# Altium PCB Carrier.PcbDoc (part 2 of 2)
Units mm, origin at the board's own origin, x right, y up, seen from the top; angles counter-clockwise.
Board outline 203.08 x 138.21 mm, 2 copper layers (Top Layer, Bottom Layer), stack 1.58 mm thick; 120 components, 113 nets, 492 pads, 85 vias.
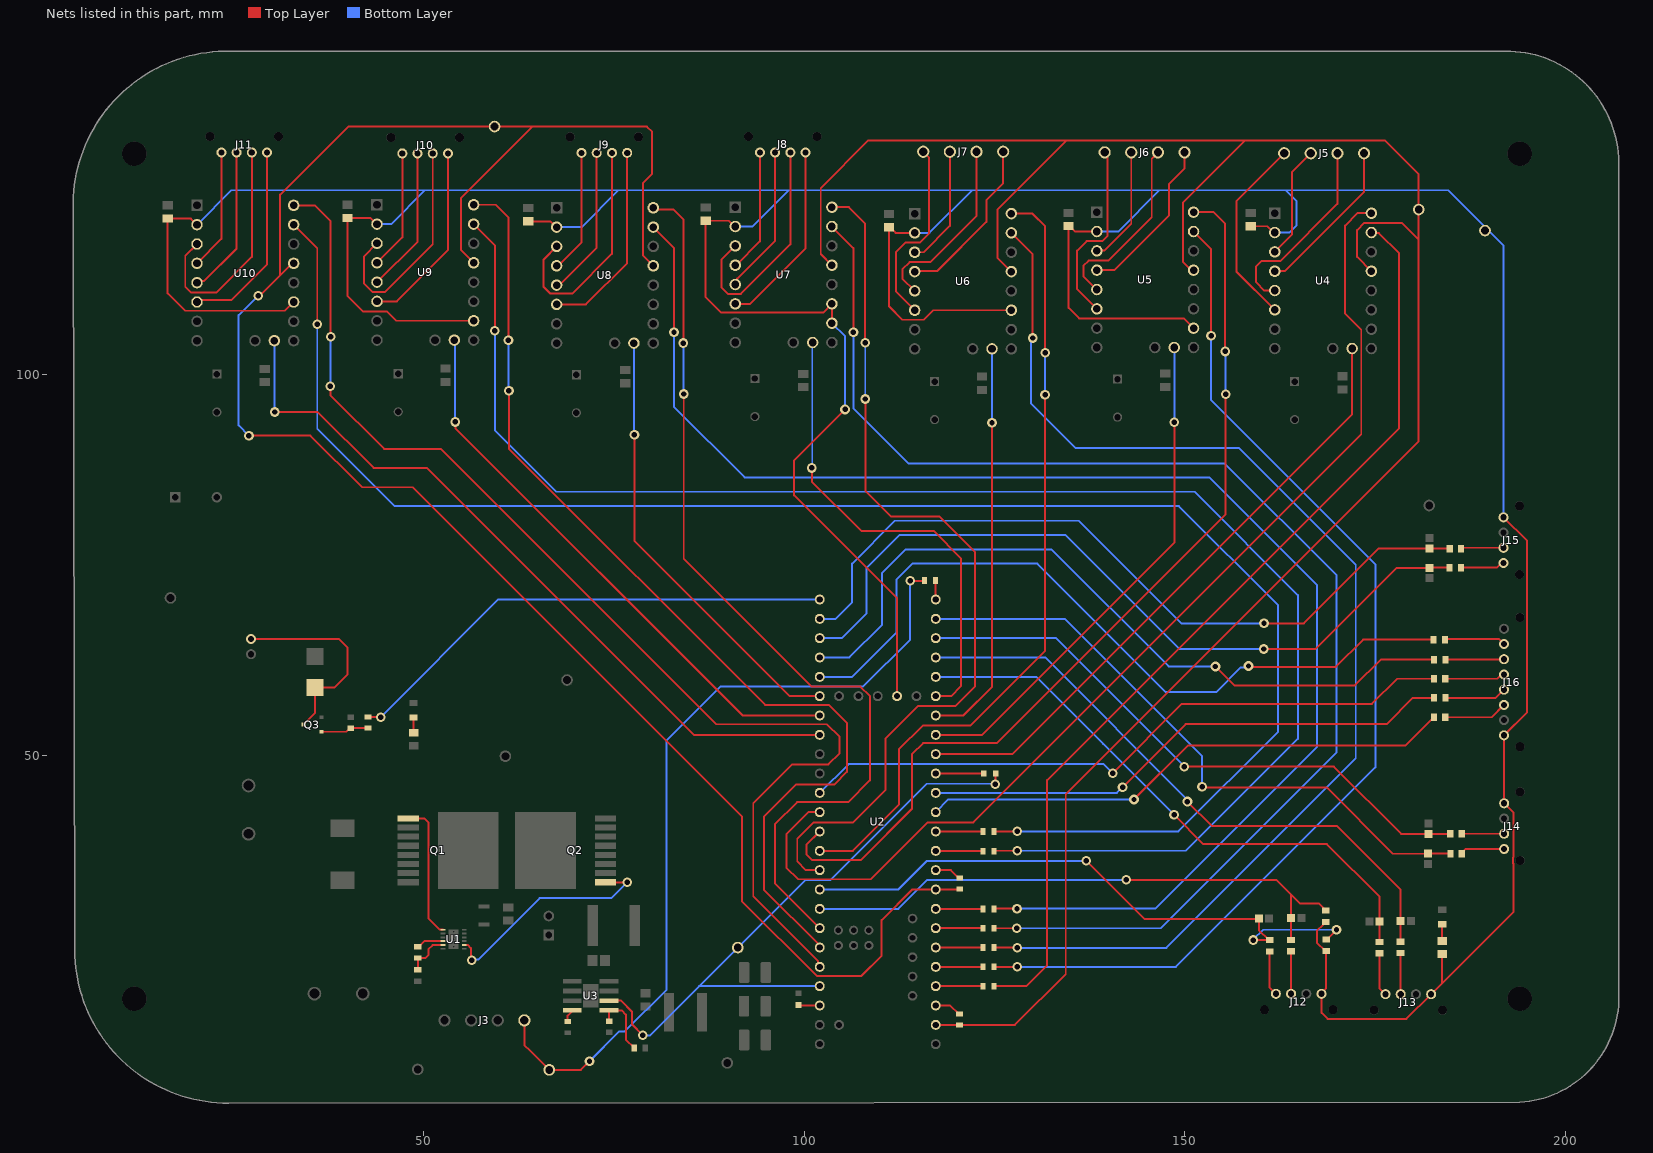
[diagram p2: the nets of this part, all layers, seen from the top]

## Via types
v1: diameter 1.27, hole 0.711, Top Layer to Bottom Layer, 65 vias
v2: diameter 0.6, hole 0.3, Top Layer to Bottom Layer, 20 vias

## Nets (pads, with @x,y where several pads share a name; then routed paths per layer and width w, separated by ;. In a path a pad name is that pad's centre, name@x,y a point inside that pad or via, vN(x,y) a via of type N, cw(c..) or ccw(c..) an arc to the next point about the centre after c; other vN are vias at no path point) (continued)
NetC31_1: C31.1 R20.1 R22.1 U2.19 | length 75.7
  Top Layer w0.254: v1(142.308,33.603) 162.023,33.603 163.967,31.659 ; R22.1@163.937,25.721 163.967,25.751 C31.1@163.967,28.588 163.967,31.659 ; R20.1@168.522,29.583 167.601,30.504 165.122,30.504 163.967,31.659
  Bottom Layer w0.254: U2.19@102.034,29.792 112.362,29.792 116.169,33.6 142.304,33.6 v1(142.308,33.603)
NetC32_1: C32.1 R21.1 R23.1 U2.18 | length 81.2
  Top Layer w0.254: v1(137.055,36.093) 144.664,28.484 159.676,28.484 C32.1@159.735,28.544 ; v1(159.003,25.69) 161.025,25.69 161.038,25.704 159.735,27.007 C32.1@159.735,28.484 ; R21.1@168.558,25.759 168.658,25.759 169.925,27.026 v1(169.925,27.043)
  Bottom Layer w0.254: U2.18@102.034,32.332 112.363,32.332 116.125,36.093 v1(137.055,36.093) ; v1(159.003,25.69) 159.003,25.778 160.267,27.043 v1(169.925,27.043)
NetC33_1: C33.1 R24.1 U2.29 | length 80.7
  Top Layer w0.254: v1(150.338,43.886) 153.575,40.649 170.004,40.649 178.338,32.315 C33.1@178.338,28.188 R24.1@178.338,25.471
  Bottom Layer w0.254: U2.29@117.274,62.812 131.641,62.812 150.338,44.116 v1(150.338,43.886)
NetC34_1: C34.1 R25.1 U2.28 | length 76.2
  Top Layer w0.254: v1(148.584,42.147) 152.446,38.285 168.662,38.285 175.58,31.366 C34.1@175.58,28.161 ; R25.1@175.553,25.458 C34.1@175.553,28.161
  Bottom Layer w0.254: U2.28@117.274,60.272 130.485,60.272 139.268,51.488 139.268,51.463 v1(148.584,42.147)
NetC35_1: C35.1 R26.1 U2.30 | length 78.3
  Top Layer w0.254: v1(149.936,48.479) 169.573,48.479 178.421,39.631 C35.1@181.993,39.631 184.833,39.631 R26.1@184.87,39.669
  Bottom Layer w0.254: U2.30@117.274,65.352 133.093,65.352 149.936,48.509 v1(149.936,48.479)
NetC36_1: C36.1 R27.1 U2.31 | length 82.8
  Top Layer w0.254: v1(152.263,45.842) 152.371,45.734 168.611,45.734 177.314,37.03 C36.1@181.973,37.03 181.997,37.054 R27.1@184.876,37.054
  Bottom Layer w0.254: U2.31@117.274,67.892 134.239,67.892 152.263,49.869 v1(152.263,45.842)
NetC37_1: C37.1 R28.1 U2.34 | length 100.8
  Top Layer w0.254: v1(160.391,67.293) 165.648,67.293 175.489,77.134 C37.1@182.131,77.134 184.781,77.134 R28.1@184.797,77.119
  Bottom Layer w0.254: U2.34@102.034,67.892 104.128,67.892 106.277,70.041 106.277,75.136 111.917,80.776 136.057,80.776 149.54,67.293 v1(160.391,67.293)
NetC38_1: C38.1 R29.1 U2.35 | length 102.5
  Top Layer w0.254: v1(160.352,63.932) 167.184,63.932 177.835,74.583 C38.1@182.122,74.583 182.148,74.609 R29.1@184.783,74.609
  Bottom Layer w0.254: U2.35@102.034,65.352 104.931,65.352 108.161,68.583 108.161,74.527 112.564,78.93 134.279,78.93 149.259,63.95 160.334,63.95 v1(160.352,63.932)
NetD2_1: D2.1 J4.2 Q3.3 | length 27.1
  Top Layer w0.254: J4.2@27.316,65.243 38.844,65.243 40.007,64.08 40.007,60.589 38.279,58.86 D2.1@35.73,58.86 35.73,55.544 Q3.3@34.192,54.007
NetD3_2: D3.2 R35.2 | length 2.2
  Top Layer w0.254: D3.2@183.802,27.77 183.802,25.569 R35.2@183.806,25.565
NetD4_2: D4.2 R36.1 | length 2
  Top Layer w0.254: D4.2@48.668,54.921 48.668,52.942 R36.1@48.69,52.921
NetJ3_4: J3.4 R9.1 TPE-STOP.1 | length 107.5
  Top Layer w0.254: J3.4@63.235,15.136 63.235,11.9 63.976,11.158 TPE-STOP.1@66.497,8.637 70.649,8.637 v1(71.786,9.774) ; v1(113.905,72.873) 115.77,72.873 R9.1@115.805,72.908
  Bottom Layer w0.254: v1(71.786,9.774) 75.694,13.682 76.419,13.682 81.926,19.189 81.926,51.924 89.004,59.002 107.743,59.002 113.905,65.164 v1(113.905,72.873)
NetJ5_1: J5.1 U4.4 | length 21.1
  Top Layer w0.254: U4.4@161.81,113.558 163.099,113.558 173.542,124.001 J5.1@173.542,129.055
NetJ5_2: J5.2 U4.5 | length 25.8
  Top Layer w0.254: U4.5@161.81,111.018 160.458,111.018 159.35,112.126 159.35,114.195 160.043,114.888 162.524,114.888 170.042,122.406 170.042,128.961 169.999,129.003 170.042,129.046 J5.2@170.042,129.055
NetJ5_3: J5.3 U4.3 | length 14.9
  Top Layer w0.254: U4.3@161.81,116.098 164.065,118.354 164.065,126.579 J5.3@166.542,129.055
NetJ5_4: J5.4 U4.6 | length 25.3
  Top Layer w0.254: U4.6@161.81,108.478 156.767,113.521 156.767,122.781 J5.4@163.042,129.055
NetJ6_1: J6.1 U5.4 | length 21.6
  Top Layer w0.254: U5.4@138.443,113.693 140.696,113.693 147.921,120.917 147.921,125.026 149.961,127.066 J6.1@149.961,129.171
NetJ6_2: J6.2 U5.5 | length 24.3
  Top Layer w0.254: U5.5@138.443,111.153 136.672,112.924 136.672,114.253 137.364,114.945 139.955,114.945 145.648,120.638 145.648,128.313 146.461,129.126 J6.2@146.461,129.171
NetJ6_3: J6.3 U5.3 | length 15.4
  Top Layer w0.254: U5.3@138.443,116.233 138.465,116.256 139.429,116.256 142.961,119.788 J6.3@142.961,129.171
NetJ6_4: J6.4 U5.6 | length 24.6
  Top Layer w0.254: U5.6@138.443,108.613 135.852,111.204 135.852,116.253 137.102,117.503 139.126,117.503 139.85,118.228 139.85,128.417 139.461,128.807 J6.4@139.461,129.171
NetJ7_1: J7.1 U6.4 | length 22.3
  Top Layer w0.254: U6.4@114.507,113.513 114.58,113.585 117.482,113.585 123.931,120.034 123.931,122.904 126.13,125.104 J7.1@126.13,129.255
NetJ7_2: J7.2 U6.5 | length 24.5
  Top Layer w0.254: U6.5@114.507,110.973 112.901,112.579 112.901,113.803 113.851,114.754 116.522,114.754 122.63,120.863 J7.2@122.63,129.255
NetJ7_3: J7.3 U6.3 | length 15.8
  Top Layer w0.254: U6.3@114.507,116.053 115.67,116.053 119.13,119.513 J7.3@119.13,129.255
NetJ7_4: J7.4 U6.6 | length 25.1
  Top Layer w0.254: U6.6@114.507,108.433 112.024,110.915 112.024,116.076 113.271,117.323 115.171,117.323 116.394,118.546 116.394,128.491 J7.4@115.63,129.255
NetJ8_1: J8.1 U7.4 | length 16.2
  Top Layer w0.254: U7.4@90.936,114.348 91.039,114.348 94.173,117.481 J8.1@94.173,129.161
NetJ8_2: J8.2 U7.5 | length 19.5
  Top Layer w0.254: U7.5@90.936,111.808 91.176,112.047 91.176,112.595 96.173,117.592 J8.2@96.173,129.161
NetJ8_3: J8.3 U7.3 | length 30.4
  Top Layer w0.254: U7.3@90.936,116.888 89.1,115.051 89.1,111.434 89.95,110.584 91.679,110.584 98.173,117.078 J8.3@98.173,129.161
NetJ8_4: J8.4 U7.6 | length 24.9
  Top Layer w0.254: U7.6@90.936,109.268 92.873,109.268 100.173,116.568 J8.4@100.173,129.161
NetJ9_1: J9.1 U8.4 | length 16.3
  Top Layer w0.254: U8.4@67.465,114.274 67.712,114.274 70.734,117.296 J9.1@70.734,129.107
NetJ9_2: J9.2 U8.5 | length 19.8
  Top Layer w0.254: U8.5@67.465,111.734 67.804,111.734 68.179,112.108 68.187,112.108 72.734,116.656 J9.2@72.734,129.107
NetJ9_3: J9.3 U8.3 | length 30.8
  Top Layer w0.254: U8.3@67.465,116.814 65.744,115.093 65.744,111.54 66.662,110.621 69.531,110.621 74.734,115.825 J9.3@74.734,129.107
NetJ9_4: J9.4 U8.6 | length 26
  Top Layer w0.254: U8.6@67.465,109.194 71.323,109.194 76.734,114.605 J9.4@76.734,129.107
NetJ10_1: J10.1 U9.4 | length 15.7
  Top Layer w0.254: U9.4@43.867,114.669 47.196,117.998 J10.1@47.196,129.035
NetJ10_2: J10.2 U9.5 | length 19.1
  Top Layer w0.254: U9.5@43.867,112.129 49.196,117.458 J10.2@49.196,129.035
NetJ10_3: J10.3 U9.3 | length 30
  Top Layer w0.254: U9.3@43.867,117.209 42.166,115.508 42.166,111.926 43.262,110.829 44.953,110.829 51.196,117.072 J10.3@51.196,129.035
NetJ10_4: J10.4 U9.6 | length 24.8
  Top Layer w0.254: U9.6@43.867,109.589 46.476,109.589 53.196,116.309 J10.4@53.196,129.035
NetJ11_1: J11.1 U10.4 | length 15.9
  Top Layer w0.254: U10.4@20.224,114.593 23.428,117.797 J11.1@23.428,129.146
NetJ11_2: J11.2 U10.5 | length 19.7
  Top Layer w0.254: U10.5@20.224,112.053 20.416,112.245 21.13,112.245 25.428,116.543 J11.2@25.428,129.146
NetJ11_3: J11.3 U10.3 | length 31
  Top Layer w0.254: U10.3@20.224,117.133 18.677,115.586 18.677,111.546 19.473,110.75 22.738,110.75 27.428,115.44 J11.3@27.428,129.146
NetJ11_4: J11.4 U10.6 | length 25.9
  Top Layer w0.254: U10.6@20.224,109.513 20.464,109.753 24.709,109.753 29.428,114.472 J11.4@29.428,129.146
NetJ12_3: J12.3 R22.2 | length 5.6
  Top Layer w0.254: R22.2@163.937,24.221 163.937,18.652 J12.3@163.958,18.631
NetJ12_4: J12.4 R23.2 | length 5.9
  Top Layer w0.254: R23.2@161.138,24.204 161.138,19.451 J12.4@161.958,18.631
NetJ13_3: J13.3 R24.2 | length 5.4
  Top Layer w0.254: J13.3@178.352,18.581 R24.2@178.352,23.971
NetJ13_4: J13.4 R25.2 | length 5.7
  Top Layer w0.254: R25.2@175.553,23.958 175.553,19.38 J13.4@176.352,18.581
NetJ14_3: J14.3 R26.2 | length 5.6
  Top Layer w0.254: R26.2@186.37,39.669 186.383,39.656 J14.3@191.944,39.656
NetJ14_4: J14.4 R27.2 | length 5.9
  Top Layer w0.254: R27.2@186.376,37.054 186.376,37.154 186.878,37.656 J14.4@191.944,37.656
NetJ15_3: J15.3 R28.2 | length 5.6
  Top Layer w0.254: R28.2@186.297,77.119 186.404,77.226 J15.3@191.852,77.226
NetJ15_4: J15.4 R29.2 | length 5.8
  Top Layer w0.254: R29.2@186.283,74.609 190.996,74.609 191.613,75.226 J15.4@191.852,75.226
NetJ16_3: J16.3 R30.2 | length 8.4
  Top Layer w0.254: R30.2@184.206,54.963 190.303,54.963 J16.3@191.926,56.586
NetJ16_4: J16.4 R31.2 | length 8.1
  Top Layer w0.254: R31.2@184.239,57.501 190.841,57.501 J16.4@191.926,58.586
NetJ16_5: J16.5 R32.2 | length 8
  Top Layer w0.254: R32.2@184.206,60.019 191.07,60.019 191.637,60.586 J16.5@191.926,60.586
NetJ16_6: J16.6 R33.2 | length 7.7
  Top Layer w0.254: R33.2@184.247,62.526 191.866,62.526 J16.6@191.926,62.586
NetJ16_7: J16.7 R34.2 | length 8
  Top Layer w0.254: R34.2@184.165,65.157 184.227,65.218 191.293,65.218 J16.7@191.926,64.586
NetQ1_1: Q1.1 U1.1 | length 18
  Top Layer w0.254: Q1.1@47.961,41.68 50.097,41.68 50.618,41.159 50.618,28.533 52.084,27.066 U1.1@52.553,27.066
NetQ2_1: Q2.1 U1.8 | length 30.2
  Top Layer w0.254: U1.8@55.333,25.046 55.336,25.043 55.81,25.043 56.214,24.639 56.214,23.129 v1(56.311,23.032) ; Q2.1@73.895,33.28 73.897,33.278 v1(76.741,33.278)
  Bottom Layer w0.254: v1(56.311,23.032) 56.4,23.12 57.152,23.12 65.23,31.199 74.662,31.199 v1(76.741,33.278)
NetQ3_1: Q3.1 R3.2 R4.2 | length 6.4
  Top Layer w0.254: Q3.1@36.579,53.057 39.857,53.057 40.339,53.538 R3.2@40.428,53.538 R3.2@40.438,53.548 ; R3.2@40.383,53.532 R4.2@42.682,53.532
NetR1_1: R1.1 R2.1 U1.5 | length 6
  Top Layer w0.254: R1.1@49.249,21.779 49.249,23.307 R2.1@49.224,23.332 50.221,23.332 50.61,23.721 50.61,24.477 51.17,25.037 U1.5@52.553,25.037
NetR2_2: R2.2 U1.4 | length 3.6
  Top Layer w0.254: R2.2@49.224,24.831 49.364,24.831 50.079,25.546 U1.4@52.553,25.546
NetR4_1: R4.1 U2.33 | length 65.7
  Top Layer w0.254: R4.1@42.692,54.992 42.699,54.987 44.368,54.987 v1(44.373,54.981)
  Bottom Layer w0.254: v1(44.373,54.981) 59.824,70.432 U2.33@102.034,70.432
NetR5_1: R5.1 R11.2 U3.5 | length 8.7
  Top Layer w0.254: R11.2@74.362,14.999 U3.5@74.362,16.454 76.015,16.454 76.579,15.89 76.579,12.603 R5.1@77.658,11.524
NetR6_1: R6.1 U10.10 | length 223.3
  Top Layer w0.254: U10.10@32.924,119.673 36.02,116.578 v1(36.02,106.6) ; R6.1@124.94,39.936 124.976,39.971 v1(127.972,39.971)
  Bottom Layer w0.254: v1(36.02,106.6) 36.02,92.876 46.197,82.699 149.214,82.699 162.24,69.672 162.24,53.055 149.156,39.971 v1(127.972,39.971)
NetR6_2: R6.2 U2.10 | length 6.2
  Top Layer w0.254: U2.10@117.274,39.952 123.474,39.952 R6.2@123.49,39.936
NetR7_1: R7.1 U2.4 | length 6.2
  Top Layer w0.254: U2.4@117.274,24.712 123.462,24.712 R7.1@123.478,24.697
NetR7_2: R7.2 U6.10 | length 158.4
  Top Layer w0.254: R7.2@124.928,24.697 127.939,24.697 v1(127.963,24.673) ; U6.10@127.207,118.593 130.008,115.791 130.008,104.794 v1(130,104.786)
  Bottom Layer w0.254: v1(127.963,24.673) 147.569,24.673 172.453,49.558 172.453,75.003 157.134,90.321 135.659,90.321 129.77,96.21 129.77,104.129 129.806,104.165 129.806,104.592 v1(130,104.786)
NetR8_1: R8.1 U2.3 | length 6.2
  Top Layer w0.254: U2.3@117.274,22.172 123.452,22.172 R8.1@123.454,22.175
NetR8_2: R8.2 U5.10 | length 141.3
  Top Layer w0.254: R8.2@124.904,22.175 v1(127.963,22.175) ; U5.10@151.143,118.773 151.143,118.732 153.45,116.425 153.45,105.093 v1(153.44,105.084)
  Bottom Layer w0.254: v1(127.963,22.175) 148.829,22.175 175.03,48.375 175.03,75.04 153.44,96.63 v1(153.44,105.084)
NetR9_2: R9.2 U2.32 | length 2.5
  Top Layer w0.254: R9.2@117.264,72.899 117.264,70.442 U2.32@117.274,70.432
NetR10_2: R10.2 U3.4 | length 1.7
  Top Layer w0.254: R10.2@68.922,14.971 68.922,15.759 U3.4@69.574,16.411
NetR12_1: R12.1 U9.10 | length 207.6
  Top Layer w0.254: U9.10@56.567,119.749 59.352,116.964 v1(59.352,105.73) ; R12.1@124.949,37.351 125.017,37.419 v1(127.988,37.419)
  Bottom Layer w0.254: v1(59.352,105.73) 59.352,92.671 67.437,84.586 151.29,84.586 164.857,71.019 164.857,52.132 150.145,37.419 v1(127.988,37.419)
NetR12_2: R12.2 U2.9 | length 6.3
  Top Layer w0.254: U2.9@117.274,37.412 123.438,37.412 R12.2@123.499,37.351
NetR13_1: R13.1 U8.10 | length 191.4
  Top Layer w0.254: U8.10@80.165,119.354 82.886,116.633 v1(82.886,105.543) ; R13.1@124.939,29.783 124.969,29.813 v1(127.953,29.813)
  Bottom Layer w0.254: v1(82.886,105.543) 82.879,105.536 82.879,95.773 92.171,86.48 153.235,86.48 167.347,72.369 167.347,51.043 146.117,29.813 v1(127.953,29.813)
NetR13_2: R13.2 U2.6 | length 6.2
  Top Layer w0.254: U2.6@117.274,29.792 123.48,29.792 R13.2@123.489,29.783
NetR14_1: R14.1 U2.8 | length 3.6
  Top Layer w0.254: U2.8@117.274,34.872 119.259,34.872 120.302,33.83 R14.1@120.427,33.83
NetR14_2: R14.2 TPUART_J5CLAW.1 U2.7 U8.12 U9.12 U10.12 | length 267.7
  Top Layer w0.254: v1(27.045,91.959) 35.119,91.959 41.904,85.173 48.558,85.173 91.803,41.929 91.803,30.819 101.675,20.947 107.454,20.947 110.153,23.646 110.153,28.306 114.18,32.332 U2.7@117.274,32.332 cw(c117.331,32.275) 117.331,32.356 120.104,32.356 R14.2@120.427,32.38 ; v1(28.25,110.334) 28.458,110.334 31.153,113.029 ; U10.12@32.924,114.593 32.717,114.593 31.153,113.029 ; U9.12@56.567,114.669 54.886,116.35 54.886,123.163 64.285,132.561 ; U8.12@80.165,114.274 78.839,115.599 78.839,125.176 80.021,126.358 80.021,131.856 79.316,132.561 64.285,132.561 ; 31.153,113.029 31.153,123.615 40.099,132.561 TPUART_J5CLAW.1@59.319,132.561 64.285,132.561
  Bottom Layer w0.254: v1(27.045,91.959) 25.696,93.308 25.696,107.779 v1(28.25,110.334)
NetR15_1: R15.1 U4.10 | length 125.6
  Top Layer w0.254: R15.1@124.928,19.629 129.168,19.629 131.912,22.374 131.912,46.716 178.153,92.956 178.153,115.896 175.496,118.553 174.595,118.553 U4.10@174.51,118.638
NetR15_2: R15.2 U2.2 | length 6.2
  Top Layer w0.254: U2.2@117.274,19.632 R15.2@123.478,19.632
NetR16_1: R16.1 U2.1 | length 3.6
  Top Layer w0.254: U2.1@117.274,17.092 119.183,17.092 120.279,15.996 R16.1@120.404,15.996
NetR16_2: R16.2 TPUART_J1J4.1 U2.0 U4.12 U5.12 U6.12 U7.12 | length 296.4
  Top Layer w0.254: U7.12@103.636,114.348 102.163,115.82 102.163,124.487 108.428,130.753 134.515,130.753 ; U2.0@117.274,14.552 117.277,14.549 120.401,14.549 R16.2@120.404,14.546 127.68,14.546 134.355,21.221 134.355,44.839 180.717,91.201 180.717,117.694 ; U6.12@127.207,113.513 125.38,115.34 125.38,121.618 134.515,130.753 ; U5.12@151.143,113.693 150.864,113.693 149.753,114.804 149.753,122.584 157.921,130.753 ; U4.12@174.51,113.558 172.627,115.441 172.627,118.947 173.594,119.913 178.498,119.913 180.717,117.694 ; 134.515,130.753 157.921,130.753 ; 157.921,130.753 176.272,130.753 180.717,126.308 TPUART_J1J4.1@180.717,121.659 180.717,117.694
NetR17_1: R17.1 U2.3.3V_1 | length 6.3
  Top Layer w0.254: U2.3.3V_1@117.274,47.572 R17.1@123.594,47.572
NetR17_2: R17.2 TPPG.1 U2.23 U3.6 | length 84.6
  Top Layer w0.254: U3.6@74.362,17.724 75.934,17.724 77.369,16.289 77.369,14.609 v1(78.803,13.175) ; v1(125.084,46.146) 125.114,46.177 125.114,47.554 R17.2@125.144,47.584
  Bottom Layer w0.254: v1(78.803,13.175) 79.742,13.175 86.199,19.632 ; U2.23@102.034,19.632 86.199,19.632 ; v1(125.084,46.146) 125.009,46.221 116.091,46.221 103.438,33.568 100.135,33.568 91.803,25.237 86.199,19.632
NetR18_1: R18.1 U2.5 | length 6.2
  Top Layer w0.254: U2.5@117.274,27.252 123.475,27.252 R18.1@123.486,27.241
NetR18_2: R18.2 U7.10 | length 175.4
  Top Layer w0.254: U7.10@103.636,119.428 106.46,116.603 v1(106.46,105.554) ; R18.2@124.936,27.241 v1(127.933,27.241)
  Bottom Layer w0.254: v1(106.46,105.554) 106.46,95.529 113.699,88.29 155.264,88.29 169.9,73.654 169.9,50.319 146.822,27.241 v1(127.933,27.241)
NetR19_1: R19.1 U2.3.3V_2 | length 2.8
  Top Layer w0.254: R19.1@99.248,17.149 99.277,17.121 102.005,17.121 U2.3.3V_2@102.034,17.092
NetR30_1: R30.1 U2.11 | length 70.7
  Top Layer w0.254: v1(143.319,44.161) 150.395,51.237 178.98,51.237 182.333,54.59 182.433,54.59 182.706,54.863 R30.1@182.706,54.963
  Bottom Layer w0.254: U2.11@117.274,42.492 118.943,44.161 v1(143.319,44.161)
NetR31_1: R31.1 U2.12 | length 70.6
  Top Layer w0.254: v1(141.815,45.783) 150.094,54.061 176.511,54.061 179.95,57.501 R31.1@182.739,57.501
  Bottom Layer w0.254: U2.12@117.274,45.032 141.065,45.032 v1(141.815,45.783)
NetR32_1: R32.1 U2.13 | length 87.9
  Top Layer w0.254: v1(140.529,47.625) 149.614,56.71 174.568,56.71 177.876,60.019 R32.1@182.706,60.019
  Bottom Layer w0.254: U2.13@102.034,45.032 105.817,48.816 139.339,48.816 v1(140.529,47.625)
NetR33_1: R33.1 U2.36 | length 99.4
  Top Layer w0.254: v1(154.017,61.632) 156.507,59.141 172.349,59.141 175.734,62.526 R33.1@182.747,62.526
  Bottom Layer w0.254: U2.36@102.034,62.812 105.924,62.812 110.184,67.072 110.184,73.862 113.345,77.023 132.476,77.023 147.867,61.632 v1(154.017,61.632)
NetR34_1: R34.1 U2.37 | length 100.8
  Top Layer w0.254: v1(158.358,61.695) 158.484,61.569 169.83,61.569 173.418,65.157 R34.1@182.665,65.157
  Bottom Layer w0.254: U2.37@102.034,60.272 106.304,60.272 112.103,66.071 112.103,73.043 114.216,75.157 130.614,75.157 147.504,58.267 154.117,58.267 157.35,61.5 158.163,61.5 v1(158.358,61.695)
NetU2_14: U2.14 U4.9 | length 142.8
  Top Layer w0.254: U2.14@102.034,42.492 100.55,42.492 97.64,39.582 97.64,35.217 99.182,33.675 108.723,33.675 116.209,41.16 122.207,41.16 173.175,92.128 173.175,105.845 171.052,107.968 171.052,119.555 172.675,121.178 U4.9@174.51,121.178
NetU2_15: U2.15 U5.9 | length 125.1
  Top Layer w0.254: U2.15@102.034,39.952 100.287,38.205 100.287,36.952 101.044,36.195 107.403,36.195 114.182,42.975 114.182,50.141 115.601,51.56 125.309,51.56 155.352,81.604 v1(155.352,97.378) ; U5.9@151.143,121.313 153.797,121.313 155.286,119.824 v1(155.286,103.019)
  Bottom Layer w0.254: v1(155.286,103.019) 155.319,102.986 155.319,97.411 v1(155.352,97.378)
NetU2_16: U2.16 U6.9 | length 105.6
  Top Layer w0.254: U2.16@102.034,37.412 106.375,37.412 112.441,43.478 112.441,50.739 115.565,53.864 121.808,53.864 131.634,63.69 v1(131.634,97.307) ; U6.9@127.207,121.133 129.983,121.133 131.635,119.481 131.635,102.856 v1(131.64,102.851)
  Bottom Layer w0.254: v1(131.634,97.307) 131.637,97.31 131.637,102.848 v1(131.64,102.851)
NetU2_17: U2.17 U7.9 | length 117.8
  Top Layer w0.254: U2.17@102.034,34.872 100.225,34.872 99.08,36.017 99.08,39.011 101.194,41.125 106.397,41.125 110.701,45.429 110.701,52.202 114.963,56.464 119.871,56.464 122.452,59.045 122.452,76.656 117.778,81.329 111.421,81.329 108.027,84.724 108.027,96.765 v1(108.031,96.769) ; U7.9@103.636,121.968 105.856,121.968 108.001,119.822 v1(108.001,104.141)
  Bottom Layer w0.254: v1(108.001,104.141) 108.016,104.126 108.016,96.784 v1(108.031,96.769)
NetU2_20: U2.20 U8.9 | length 123.1
  Top Layer w0.254: U8.9@80.165,121.894 80.404,121.654 82.84,121.654 84.123,120.371 v1(84.123,104.121) ; v1(84.167,97.425) 84.167,75.814 100.982,58.998 107.377,58.998 108.608,57.767 108.608,46.662 105.767,43.82 99.068,43.82 96.139,40.891 96.139,33.147 U2.20@102.034,27.252
  Bottom Layer w0.254: v1(84.123,104.121) 84.145,104.1 84.145,97.447 v1(84.167,97.425)
NetU2_21: U2.21 U9.9 | length 135
  Top Layer w0.254: U9.9@56.567,122.289 59.46,122.289 61.165,120.584 61.165,104.507 v1(61.138,104.48) ; v1(61.204,97.844) 61.204,90.238 94.845,56.597 103.23,56.597 105.606,54.222 105.606,47.78 103.975,46.149 98.963,46.149 94.702,41.888 94.702,32.309 102.034,24.977 U2.21@102.034,24.712
  Bottom Layer w0.254: v1(61.138,104.48) 61.171,104.447 61.171,97.877 v1(61.204,97.844)
NetU2_22: U2.22 U10.9 | length 155.4
  Top Layer w0.254: U10.9@32.924,122.213 35.709,122.213 37.779,120.143 v1(37.779,104.967) ; v1(37.748,98.444) 37.745,98.442 37.745,97.27 44.808,90.207 52.245,90.207 88.411,54.041 102.975,54.041 104.632,52.385 104.632,50.238 103.163,48.77 98.403,48.77 93.298,43.664 93.298,31.458 101.832,22.924 101.832,22.374 U2.22@102.034,22.172
  Bottom Layer w0.254: v1(37.748,98.444) 37.763,98.46 37.763,104.951 v1(37.779,104.967)
NetU2_24: U2.24 U4.18 | length 81.8
  Top Layer w0.254: U2.24@117.274,50.112 127.346,50.112 171.97,94.736 U4.18@171.97,103.398
NetU2_25: U2.25 U5.18 | length 67.4
  Top Layer w0.254: U2.25@117.274,52.652 123.376,52.652 148.621,77.897 v1(148.621,93.703)
  Bottom Layer w0.254: U5.18@148.603,103.533 148.612,103.524 148.612,93.712 v1(148.621,93.703)
NetU2_26: U2.26 U6.18 | length 53.3
  Top Layer w0.254: U2.26@117.274,55.192 120.891,55.192 124.667,58.968 v1(124.667,93.629)
  Bottom Layer w0.254: v1(124.667,93.629) U6.18@124.667,103.353
NetU2_27: U2.27 U7.18 | length 62.7
  Top Layer w0.254: v1(100.999,87.715) 100.999,85.924 107.487,79.436 116.987,79.436 120.589,75.835 120.589,59.031 119.29,57.732 U2.27@117.274,57.732
  Bottom Layer w0.254: v1(100.999,87.715) 101.047,87.764 101.047,104.139 U7.18@101.096,104.188
NetU2_38: U2.38 U8.18 | length 58.9
  Top Layer w0.254: v1(77.689,92.074) 77.689,78.151 98.108,57.732 U2.38@102.034,57.732
  Bottom Layer w0.254: U8.18@77.625,104.114 77.632,104.106 77.632,91.95 v1@77.639,91.943
NetU2_39: U2.39 U9.18 | length 75.1
  Top Layer w0.254: v1(54.152,93.759) 54.198,93.713 54.198,92.892 91.897,55.192 U2.39@102.034,55.192
  Bottom Layer w0.254: U9.18@54.027,104.509 54.089,104.447 54.089,93.821 v1(54.152,93.759)
NetU2_40: U2.40 U10.18 | length 98.6
  Top Layer w0.254: v1(30.437,95.06) 36.089,95.06 43.422,87.727 50.408,87.727 85.483,52.652 U2.40@102.034,52.652
  Bottom Layer w0.254: U10.18@30.384,104.433 30.41,104.407 30.41,95.087 v1(30.437,95.06)
VIO_SHARED: C18.1 C19.1 C20.1 C21.1 C28.1 C29.1 C30.1 J12.1 J13.1 J14.1 J15.1 J16.1 R20.2 R21.2 R35.1 TPVIO_SHARED.1 U2.3.3V_3 U4.2 U5.2 U5.15 U6.2 U6.14 U7.2 U7.14 U7.15 U8.2 U9.2 U9.15 U10.2 U10.14 | length 599.8
  Top Layer w0.254: U10.2@20.224,119.673 20.209,119.673 19.414,120.468 C29.1@16.375,120.468 16.375,110.649 18.662,108.361 31.772,108.361 U10.14@32.924,109.513 ; U9.2@43.867,119.749 43.822,119.749 43.042,120.529 C19.1@40.002,120.529 40.002,110.286 41.997,108.29 45.131,108.29 46.372,107.049 U9.15@56.567,107.049 ; C28.1@63.756,120.116 66.622,120.116 67.385,119.354 U8.2@67.465,119.354 ; U7.2@90.936,119.428 90.847,119.428 90.089,120.186 C18.1@87.048,120.186 87.048,110.164 89.089,108.123 102.492,108.123 U7.14@103.636,109.268 U7.15@103.636,106.728 ; v1(105.36,95.398) 98.665,88.703 98.665,84.117 112.194,70.588 U2.3.3V_3@112.194,57.732 ; U6.2@114.507,118.593 112.012,118.593 111.272,119.332 C20.1@111.133,119.332 111.133,108.949 112.897,107.184 115.715,107.184 116.963,108.433 U6.14@127.207,108.433 ; U5.2@138.443,118.773 135.574,118.773 134.87,119.477 C21.1@134.73,119.477 134.73,108.74 136.097,107.372 149.843,107.372 U5.15@151.143,106.073 ; C30.1@158.657,119.465 160.846,119.465 161.673,118.638 U4.2@161.81,118.638 ; R21.2@168.497,24.298 168.418,24.298 167.355,25.361 167.355,26.916 168.149,27.71 168.149,27.81 168.422,28.083 R20.2@168.522,28.083 ; R21.2@168.558,24.259 168.558,19.374 167.958,18.775 J12.1@167.958,18.631 167.958,16.128 168.747,15.339 179.111,15.339 J13.1@182.352,18.581 183.806,20.034 ; R35.1@183.806,23.859 183.806,20.034 ; J15.1@191.852,81.226 194.95,78.128 194.95,55.61 J16.1@191.926,52.586 191.935,52.577 191.935,43.665 J14.1@191.944,43.656 193.195,42.405 193.195,36.613 193.12,36.539 193.12,35.773 193.195,35.698 193.195,29.423 183.806,20.034
  Bottom Layer w0.254: U10.2@20.224,119.673 24.743,124.192 50.167,124.192 ; U9.2@43.867,119.749 45.724,119.749 50.167,124.192 ; U8.2@67.465,119.354 70.753,119.354 75.591,124.192 ; U7.2@90.936,119.428 93.171,119.428 97.936,124.192 ; U7.15@103.636,106.728 105.36,105.003 v1(105.36,95.398) ; U6.2@114.507,118.593 116.448,118.593 122.047,124.192 ; U5.2@138.443,118.773 141.242,118.773 146.661,124.192 ; U4.2@161.81,118.638 163.688,118.638 164.669,119.62 164.669,122.761 163.238,124.192 ; J15.1@191.852,81.226 191.852,116.948 184.608,124.192 163.238,124.192 ; 50.167,124.192 75.591,124.192 ; 75.591,124.192 97.936,124.192 ; 97.936,124.192 122.047,124.192 ; 122.047,124.192 146.661,124.192 ; 146.661,124.192 163.238,124.192
pads on no net: J8.5 J8.6 J9.5 J9.6 J10.5 J10.6 J11.5 J11.6 J12.5 J12.6 J13.5 J13.6 J14.5 J14.6 J15.5 J15.6 J16.9 J16.10 U1.13 U1.14 U1.15 U1.16 U2.5V U2.D+ U2.D- U2.LED U2.ON/OFF U2.PROGRAM U2.R+ U2.R- U2.T+ U2.T- U2.VBAT U2.VUSB U4.11 U4.13 U4.17 U5.11 U5.13 U5.17 U6.11 U6.13 U6.17 U7.11 U7.13 U7.17 U8.11 U8.13 U8.17 U9.11 U9.13 U9.17 U10.11 U10.13 U10.17

## Polygon pours and split planes (outlines as drawn)
24V_Protected on Top Layer (solid, remove dead copper, pour order 61): 51.513,14.457 52.014,13.949 53.149,13.949 53.937,14.737 53.937,16.183 55.159,17.406 66.139,17.418 66.126,17.405 68.319,17.418 70.713,17.418 70.713,19.31 68.319,19.31 67.662,19.967 67.662,20.55 69.412,22.3 72.62,22.3 72.62,30.411 72.118,30.914 72.118,33.682 72.521,34.085 75.895,34.085 76.185,34.376 76.185,47.102 71.816,51.471 30.301,51.471 29.102,52.671 29.079,60.868 30.056,61.845 36.86,61.845 37.217,62.202 37.217,63.733 36.895,64.055 26.794,64.055 25.103,62.363 25.103,45.153 25.605,44.651 49.555,44.651 51.72,46.815 68.56,46.815 70.793,44.582 70.793,31.11 66.746,27.063 65.772,27.063 64.385,25.676 55.049,25.676 55.049,25.426 55.669,25.426 57.472,23.624 57.472,22.362 56.988,21.879 54.552,21.879 51.572,19.157
+24V on Top Layer (solid, pour order 59): 43.816,23.256 45.474,23.256 47.845,25.628 48.146,25.929 52.866,25.929 52.866,26.666 51.168,26.666 49.649,28.185 49.649,40.593 49.361,40.88 43.373,40.88 33.37,30.877 33.37,18.743 34.672,17.581 38.141,17.581
NetC1_1 on Top Layer "Top Layer-NetC1_1" (solid, pour order 22): 60.427,30.9 60.443,29.457 61.789,29.457 61.789,30.93 62.089,31.23 62.582,31.723 62.801,31.942 69.543,31.942 69.995,32.393 69.995,43.785 68.273,45.508 53.148,45.508 51.861,44.221 51.861,32.43 55.023,29.268 55.023,26.921 55.824,26.921 55.824,30.462 56.592,31.23 60.095,31.23
NetC7_2 on Top Layer "NETC7_2_L01_P033" (solid, remove dead copper, pour order 33): 73.125,20.575 73.125,19.953 76.672,19.953 78.51,18.115 79.943,18.115 81.3,16.758 81.3,13.987 81.585,13.703 82.88,13.703 83.18,14.003 83.18,18.407 82.354,19.233 79.805,19.233 78.463,20.575 75.599,20.575
24V_Motor on Top Layer "24V_MOTOR_L01_P045" (solid, pour order 45): 22.195,36.206 12.544,45.857 12.544,98.086 19.803,105.346 24.384,105.346 26.517,103.212 40.171,103.212 42.457,105.498 47.998,105.498 50.284,103.212 64.611,103.212 66.555,105.156 71.77,105.156 74.324,102.602 87.263,102.602 89.969,105.308 94.494,105.308 97.199,102.602 112.425,102.602 114.181,104.358 118.578,104.358 121.203,101.733 134.555,101.733 137.59,104.768 142.477,104.768 145.369,101.972 158.584,101.972 161.094,104.482 165.843,104.482 169.478,100.847 171.196,100.847 171.398,100.645 171.398,99.206 165.827,99.206 165.057,98.436 149.23,98.436 148.114,99.552 148.063,99.501 142.524,99.501 141.783,98.761 124.454,98.761 124.048,99.167 123.997,99.117 118.437,99.117 117.752,98.431 101.65,98.431 100.562,99.519 100.511,99.469 94.785,99.469 94.156,98.839 78.366,98.839 77.179,100.027 71.398,100.027 70.702,99.331 54.445,99.331 53.578,100.198 53.527,100.147 47.978,100.147 47.293,99.462 30.547,99.462 29.832,100.177 24.23,100.177 23.471,99.418 18.927,94.874 18.927,50.036 29,39.963 29,37 28.206,36.206
NetC4_1 on Top Layer (solid, remove dead copper, pour order 51): 85.329,9.89 87.349,7.87 100.506,7.87 103.19,10.555 103.19,12.473 102.568,13.096 101.033,13.096 98.304,10.367 94.229,10.367 93.075,11.522 93.075,22.589 92.624,23.039 90.261,23.039 85.329,18.108 85.329,13.462 84.115,12.248 79.027,12.248 78.697,11.918 78.697,11.13 79.938,9.89
no net on Top Layer "NONET_L01_P052" (solid, pour order 52): 25.103,45.153 25.608,44.648 44.642,44.648 44.645,44.651 25.605,44.651 25.103,45.153
GND on Bottom Layer "GND_L02_P062" (solid, pour order 62): 4.161,24.355 ccw(c24.314,24.417) 24.377,4.263 24.345,4.276 193.968,4.374 193.999,4.373 ccw(c193.194,18.174) 206.995,18.979 206.995,127.863 ccw(c192.256,127.728) 192.12,142.467 24.593,142.469 ccw(c24.222,122.187) 3.94,122.558

## Keep-outs
Top Layer:
  region: 190,133 190,125 198,125 198,133
  region: 8,133 8,125 16,125 16,133
  region: 8,22 8,14 16,14 16,22
  region: 190,22 190,14 198,14 198,22

## Silkscreen, mask and mechanical layers (free items; w line width, h text height)
Mechanical 1:
  lines w0.254: 24.345,4.276 193.968,4.374 ; 24.377,4.263 cw(c24.314,24.417) 4.161,24.355 3.94,122.558 cw(c24.222,122.187) 24.593,142.469 192.12,142.467 cw(c192.256,127.728) 206.995,127.863 206.995,18.979 cw(c193.194,18.174) 193.999,4.373

## Text inside footprints (layer, text, board x,y; h text height)
J3: Mechanical 13 "RefDes2" at 55.761,14.502 h1.27; Top Overlay "RefDes" at 56.079,14.502 h1.27; Top Overlay "REFDES" at 55.761,14.502 h1.27
J5: Mechanical 13 "RefDes2" at 170.514,129.69 h1.27 r180; Top Overlay "RefDes" at 170.197,129.69 h1.27 r180; Top Overlay "REFDES" at 170.514,129.69 h1.27 r180
J6: Mechanical 13 "RefDes2" at 146.934,129.806 h1.27 r180; Top Overlay "RefDes" at 146.616,129.806 h1.27 r180; Top Overlay "REFDES" at 146.934,129.806 h1.27 r180
J7: Mechanical 13 "RefDes2" at 123.103,129.89 h1.27 r180; Top Overlay "RefDes" at 122.785,129.89 h1.27 r180; Top Overlay "REFDES" at 123.103,129.89 h1.27 r180
J8: Mechanical 13 "RefDes2" at 94.951,128.526 h1.27; Top Overlay "RefDes" at 95.268,128.526 h1.27; Top Overlay "REFDES" at 94.951,128.526 h1.27
J9: Mechanical 13 "RefDes2" at 71.512,128.472 h1.27; Top Overlay "RefDes" at 71.829,128.472 h1.27; Top Overlay "REFDES" at 71.512,128.472 h1.27
J10: Mechanical 13 "RefDes2" at 47.973,128.4 h1.27; Top Overlay "RefDes" at 48.291,128.4 h1.27; Top Overlay "REFDES" at 47.973,128.4 h1.27
J11: Mechanical 13 "RefDes2" at 24.205,128.511 h1.27; Top Overlay "RefDes" at 24.523,128.511 h1.27; Top Overlay "REFDES" at 24.205,128.511 h1.27
J12: Mechanical 13 "RefDes2" at 167.181,19.266 h1.27 r180; Top Overlay "RefDes" at 166.863,19.266 h1.27 r180; Top Overlay "REFDES" at 167.181,19.266 h1.27 r180
J13: Mechanical 13 "RefDes2" at 181.575,19.216 h1.27 r180; Top Overlay "RefDes" at 181.257,19.216 h1.27 r180; Top Overlay "REFDES" at 181.575,19.216 h1.27 r180
J14: Mechanical 13 "RefDes2" at 191.309,42.878 h1.27 r270; Top Overlay "RefDes" at 191.309,42.561 h1.27 r270; Top Overlay "REFDES" at 191.309,42.878 h1.27 r270
J15: Mechanical 13 "RefDes2" at 191.217,80.448 h1.27 r270; Top Overlay "RefDes" at 191.217,80.131 h1.27 r270; Top Overlay "REFDES" at 191.217,80.448 h1.27 r270
U2: Mechanical 13 "Teensy 4.1" at 109.314,40.972 h1.27 r90